# Altium PCB PCB_DevBoard_2024-04-22.pcbdoc
Units mm, origin at the board's own origin, x right, y up, seen from the top; angles counter-clockwise.
Board outline 130.65 x 125.25 mm, 2 copper layers (Top Layer, Bottom Layer); 54 components, 76 nets, 222 pads, 0 vias.
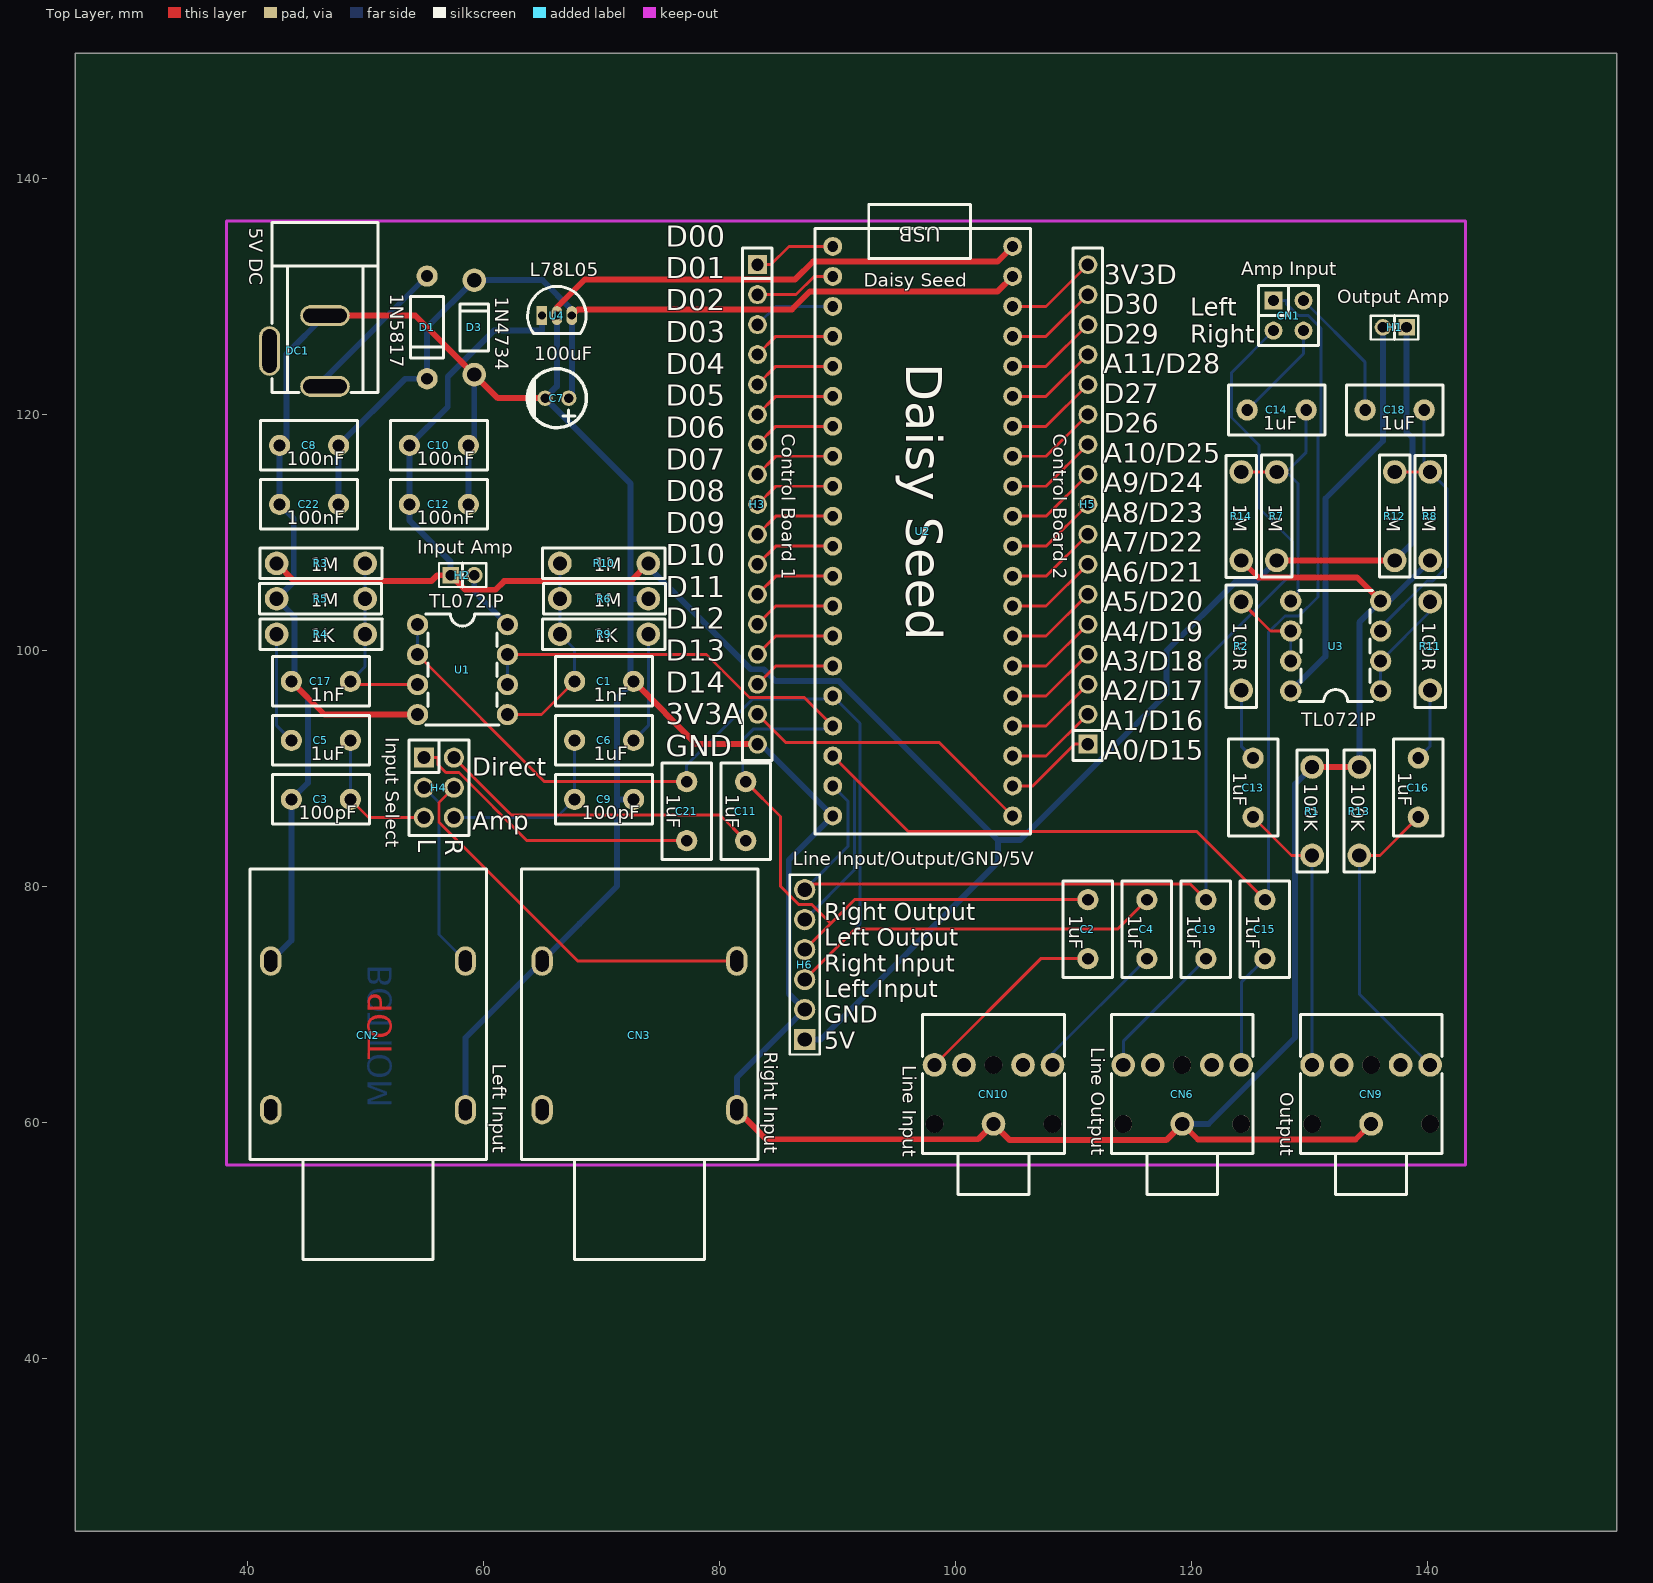
[diagram p0: Top Layer view]
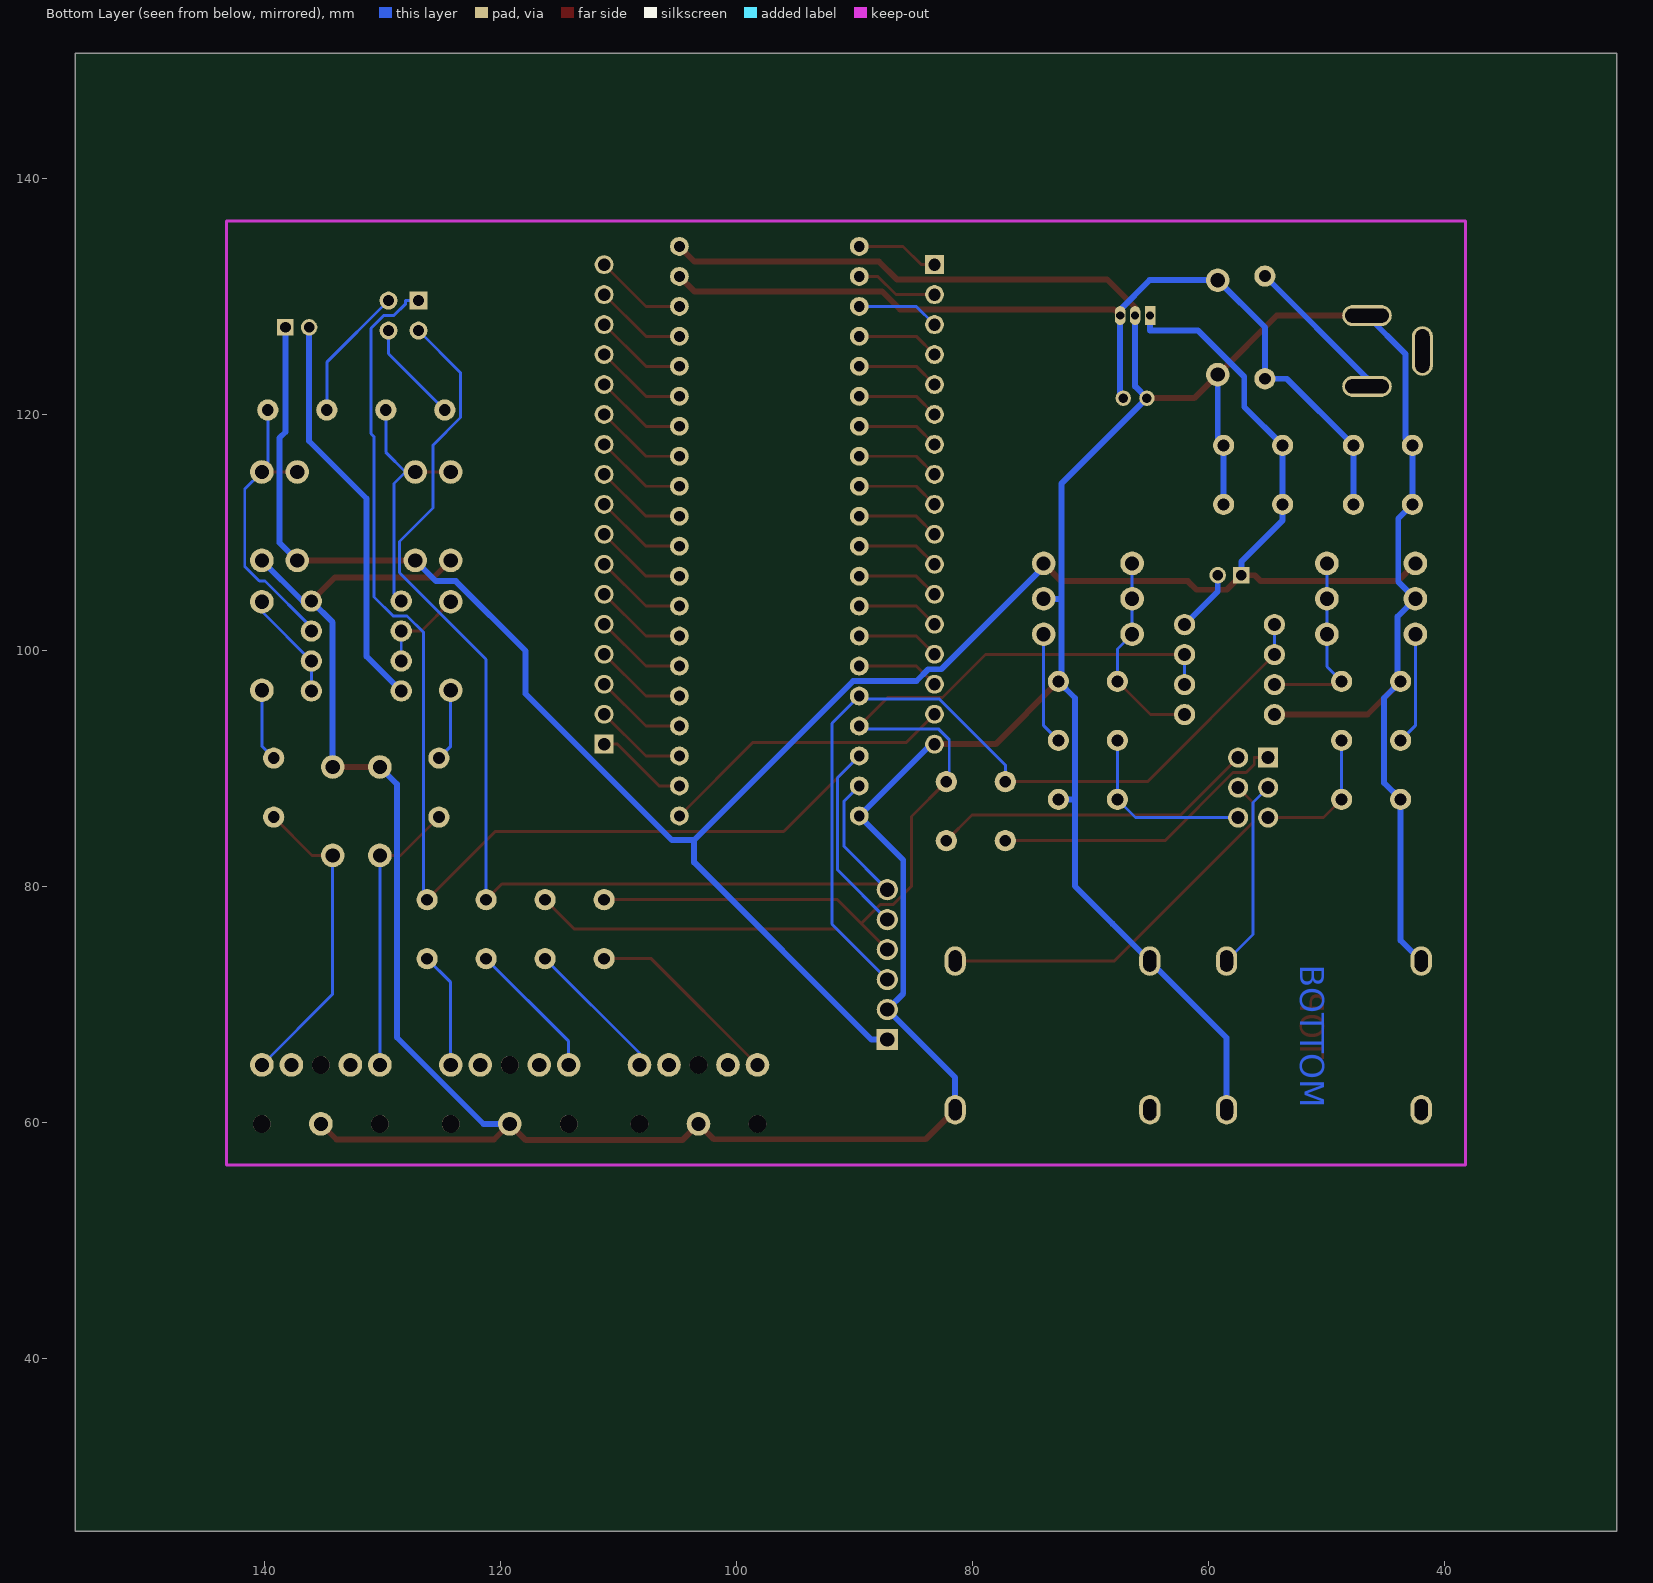
[diagram p1: Bottom Layer view, seen from below]

## Layer stack, top to bottom
Top Solder: solder mask 0.0102, Solder Resist, Dk 3.5
Top Layer: signal copper 0.0356
Dielectric1: dielectric 0.32, FR-4, Dk 4.8
Bottom Layer: signal copper 0.0356
Bottom Solder: solder mask 0.0102, Solder Resist, Dk 3.5

## Board outline
156.054,25.4 25.4,25.4 25.4,150.653 156.054,150.653

## Design rules (kind name [scope] priority, off if disabled: settings)
Clearance [All] p1: gap=0.254 ignorepadtopadclearanceinfootprint=FALSE except(0: Arc-Hole Track-Hole SMDPad-Hole THPad-Hole Via-Hole Fill-Hole Poly-Hole Region-Hole Text-Hole)
PolygonConnect [All] p1: connectstyle=Relief reliefconductorwidth=0.254 reliefentries=4 polygonreliefangle="90 Angle" airgapwidth=0.254
RoutingVias [All] p1: holewidth=0.711 width=1.27 viastyle="Through Hole" minholewidth=0.711 minwidth=1.27 maxholewidth=0.711 maxwidth=1.27
SolderMaskExpansion [All] p1: expansion=0.102 istentingtop=FALSE
Width [All] p1: maxlimit=0.254 minlimit=0.254 preferedwidth=0.254
30 further rules are at their usual default settings.

## Components (designator, comment, footprint, x,y, rotation, side; value= is the part's Value field where it differs from the comment)
C1 "1nF" CAP-TH_L8.0-W4.0-P5.00-D0.7 70.227,97.41 r0 top
C2 "1uF" CAP-TH_L8.0-W4.0-P5.00-D0.7 111.227,76.41 r90 top
C3 "100pF" CAP-TH_L8.0-W4.0-P5.00-D0.7 46.227,87.41 r180 top
C4 "1uF" CAP-TH_L8.0-W4.0-P5.00-D0.7 116.227,76.41 r90 top
C5 "1uF" CAP-TH_L8.0-W4.0-P5.00-D0.7 46.227,92.41 r180 top
C6 "1uF" CAP-TH_L8.0-W4.0-P5.00-D0.7 70.227,92.41 r0 top
C7 "100uF" CAP-TH_BD5.0-P2.00-D0.8-FD 66.227,121.41 r180 top
C8 "100nF" CAP-TH_L8.0-W4.0-P5.00-D0.7 45.227,117.41 r0 top
C9 "100pF" CAP-TH_L8.0-W4.0-P5.00-D0.7 70.227,87.41 r0 top
C10 "100nF" CAP-TH_L8.0-W4.0-P5.00-D0.7 56.227,117.41 r180 top
C11 "1uF" CAP-TH_L8.0-W4.0-P5.00-D0.7 82.227,86.41 r90 top
C12 "100nF" CAP-TH_L8.0-W4.0-P5.00-D0.7 56.227,112.41 r180 top
C13 "1uF" CAP-TH_L8.0-W4.0-P5.00-D0.7 125.227,88.41 r270 top
C14 "1uF" CAP-TH_L8.0-W4.0-P5.00-D0.7 127.227,120.41 r0 top
C15 "1uF" CAP-TH_L8.0-W4.0-P5.00-D0.7 126.227,76.41 r270 top
C16 "1uF" CAP-TH_L8.0-W4.0-P5.00-D0.7 139.227,88.41 r270 top
C17 "1nF" CAP-TH_L8.0-W4.0-P5.00-D0.7 46.227,97.41 r180 top
C18 "1uF" CAP-TH_L8.0-W4.0-P5.00-D0.7 137.227,120.41 r0 top
C19 "1uF" CAP-TH_L8.0-W4.0-P5.00-D0.7 121.226,76.41 r270 top
C21 "1uF" CAP-TH_L8.0-W4.0-P5.00-D0.7 77.227,86.41 r90 top
C22 "100nF" CAP-TH_L8.0-W4.0-P5.00-D0.7 45.227,112.41 r0 top
CN1 "Amp Input" HDR-TH_4P-P2.54-V-M-R2-C2-S2.54-1 128.227,128.41 r270 top
CN2 "Left Input" AUDIO-TH_CK6.35-3-15-6 50.227,67.411 r90 top
CN3 "Right Input" AUDIO-TH_CK6.35-3-15-6 73.226,67.411 r90 top
CN6 "Line Output" AUDIO-TH_XKB_PJ-3062-HD-R 119.226,62.41 r90 top
CN9 "Output" AUDIO-TH_XKB_PJ-3062-HD-R 135.227,62.41 r90 top
CN10 "Line Input" AUDIO-TH_XKB_PJ-3062-HD-R 103.228,62.409 r90 top
D1 "1N5817" DO-41_BD2.4-L4.7-P8.70-D0.9-RD 55.227,127.41 r90 top
D3 "1N4734" DO-41G_BD2.4-L4.0-P8.00-D0.7-RD 59.227,127.41 r270 top
DC1 "5V DC" CONN-TH_DC-005-2.5A-2.0 44.226,125.411 r270 top
H1 "Output Amp" HDR-TH_2P-P2.00-V-M 137.227,127.41 r180 top
H2 "Input Amp" HDR-TH_2P-P2.00-V-M 58.227,106.41 r0 top
H3 "Control Board 1" HDR-TH_17P-P2.54-V-M 83.227,112.41 r270 top
H4 "Input Select" HDR-TH_6P-P2.54-V-M-R2-C3-S2.54 56.227,88.41 r270 top
H5 "Control Board 2" HDR-TH_17P-P2.54-V-M 111.227,112.41 r90 top
H6 "Line Input/Output/GND/5V" HDR-TH_6P-P2.54-V-M-1 87.227,73.41 r90 top
R1 "100K" PS-RES-16.5*6.42 130.227,86.41 r270 top
R2 "100R" PS-RES-16.5*6.42 124.227,100.41 r90 top
R3 "1M" PS-RES-16.5*6.42 46.227,107.41 r180 top
R4 "1K" PS-RES-16.5*6.42 46.227,101.41 r180 top
R5 "1M" PS-RES-16.5*6.42 46.227,104.41 r0 top
R6 "1M" PS-RES-16.5*6.42 70.227,104.41 r180 top
R7 "1M" PS-RES-16.5*6.42 127.227,111.41 r270 top
R8 "1M" PS-RES-16.5*6.42 140.227,111.41 r90 top
R9 "1K" PS-RES-16.5*6.42 70.227,101.41 r0 top
R10 "1M" PS-RES-16.5*6.42 70.227,107.41 r0 top
R11 "100R" PS-RES-16.5*6.42 140.227,100.41 r90 top
R12 "1M" PS-RES-16.5*6.42 137.227,111.41 r270 top
R13 "100K" PS-RES-16.5*6.42 134.227,86.41 r270 top
R14 "1M" PS-RES-16.5*6.42 124.227,111.41 r90 top
U1 "TL072IP" PDIP-8_L10.2-W5.9-P2.54-LS7.6-BL 58.227,98.41 r270 top
U2 "Daisy Seed" DAISY_SEED 97.227,111.41 r180 top
U3 "TL072IP" PDIP-8_L10.2-W5.9-P2.54-LS7.6-BL 132.227,100.41 r90 top
U4 "L78L05" TO-92-3_L4.9-W3.7-P1.27-L 66.227,128.41 r0 top

## Footprints (in the part's own frame and the unit in brackets; to place one, negate y for a bottom-side part, rotate by r counter-clockwise, add the part's x,y. Pads: shape width x height; smd on the part's side, far side on the other; paste and mask are expansions set on the pad)
AUDIO-TH_CK6.35-3-15-6 [mm]
  oval 2.5x1.8 hole 1.1 slot 1.8 at 0 deg paste+0 mask+0.051: 1(-6.3,-8.25) 2(-6.3,8.25) 3(6.3,-8.25) 4(6.3,8.25)
  silkscreen extent -19,-10.03 14.1,10
AUDIO-TH_XKB_PJ-3062-HD-R [mm]
  round 2 hole 1.2 paste+0 mask+0.051: 1(-2.5,0) 2(2.5,5) 3(2.5,2.5) 4(2.5,-2.5) 5(2.5,-5)
  round 1.5 hole 1.5 unplated paste+0: ""(-2.5,5) ""(-2.5,-5) ""(2.5,0)
  silkscreen extent -8.5,-6 6.77,6
CAP-TH_BD5.0-P2.00-D0.8-FD [mm]
  round 1.3 hole 0.8 paste+0 mask+0.051: 1(-1,0) 2(1,0)
  silkscreen extent -2.5,-2.5 2.5,2.5
CAP-TH_L8.0-W4.0-P5.00-D0.7 [mm]
  round 1.8 hole 1 paste+0 mask+0.051: 1(-2.5,0) 2(2.5,0)
  silkscreen extent -4.1,-2.1 4.1,2.1
CONN-TH_DC-005-2.5A-2.0 [mm]
  oval 1.8x4.2 hole 1.2 slot 3.7 at 90 deg paste+0 mask+0.051: 1(3,2.35) 2(-3,2.35)
  oval 4.2x1.8 hole 1.2 slot 3.7 at 0 deg paste+0 mask+0.051: 3(0,-2.35)
  silkscreen extent -10.9,-2.15 3.5,6.85
DAISY_SEED [mm]
  round 1.6 hole 0.914 paste+0 mask+0.102: 1(7.62,-22.86) 2(7.62,-20.32) 3(7.62,-17.78) 4(7.62,-15.24) 5(7.62,-12.7) 6(7.62,-10.16) 7(7.62,-7.62) 8(7.62,-5.08) 9(7.62,-2.54) 10(7.62,0) 11(7.62,2.54) 12(7.62,5.08) 13(7.62,7.62) 14(7.62,10.16) 15(7.62,12.7) 16(7.62,15.24) 17(7.62,17.78) 18(7.62,20.32) 19(7.62,22.86) 20(7.62,25.4) 21(-7.62,25.4) 22(-7.62,22.86) 23(-7.62,20.32) 24(-7.62,17.78) 25(-7.62,15.24) 26(-7.62,12.7) 27(-7.62,10.16) 28(-7.62,7.62) 29(-7.62,5.08) 30(-7.62,2.54) 31(-7.62,0) 32(-7.62,-2.54) 33(-7.62,-5.08) 34(-7.62,-7.62) 35(-7.62,-10.16) 36(-7.62,-12.7) 37(-7.62,-15.24) 38(-7.62,-17.78) 39(-7.62,-20.32) 40(-7.62,-22.86)
  silkscreen extent -9.14,-26.42 9.14,26.92
DO-41_BD2.4-L4.7-P8.70-D0.9-RD [mm]
  round 1.8 hole 1 paste+0 mask+0.051: 1(-4.35,0) 2(4.35,0)
  silkscreen extent -2.6,-1.4 2.6,1.4
DO-41G_BD2.4-L4.0-P8.00-D0.7-RD [mm]
  round 2 hole 1.2 paste+0 mask+0.051: 1(-4,0) 2(4,0)
  silkscreen extent -2,-1.2 2,1.2
HDR-TH_2P-P2.00-V-M [mm]
  rect 1.4x1.4 hole 0.9 paste+0 mask+0.051: 1(-1,0)
  round 1.4 hole 0.9 paste+0 mask+0.051: 2(1,0)
  silkscreen extent -1.99,-1 2.02,1.03
HDR-TH_4P-P2.54-V-M-R2-C2-S2.54-1 [mil]
  rect 60x60 hole 36 paste+0 mask+2: 1(-50,-50)
  round 60 hole 36 paste+0 mask+2: 2(-50,50) 3(50,-50) 4(50,50)
  silkscreen extent -100,-100 100,100
HDR-TH_6P-P2.54-V-M-1 [mm]
  rect 1.8x1.8 hole 1.2 paste+0 mask+0.051: 1(-6.35,0)
  round 1.8 hole 1.2 paste+0 mask+0.051: 2(-3.81,0) 3(-1.27,0) 4(1.27,0) 5(3.81,0) 6(6.35,0)
  silkscreen extent -7.62,-1.27 7.62,1.27
HDR-TH_6P-P2.54-V-M-R2-C3-S2.54 [mm]
  rect 1.7x1.7 hole 1.1 paste+0 mask+0.051: 1(-2.54,-1.27)
  round 1.7 hole 1.1 paste+0 mask+0.051: 2(-2.54,1.27) 3(0,-1.27) 4(0,1.27) 5(2.54,-1.27) 6(2.54,1.27)
  silkscreen extent -4.04,-2.54 4.04,2.54
HDR-TH_17P-P2.54-V-M [mm]
  rect 1.6x1.6 hole 1.05 paste+0 mask+0.051: 1(-20.32,0)
  round 1.6 hole 1.05 paste+0 mask+0.051: 2(-17.78,0) 3(-15.24,0) 4(-12.7,0) 5(-10.16,0) 6(-7.62,0) 7(-5.08,0) 8(-2.54,0) 9(0,0) 10(2.54,0) 11(5.08,0) 12(7.62,0) 13(10.16,0) 14(12.7,0) 15(15.24,0) 16(17.78,0) 17(20.32,0)
  silkscreen extent -21.71,-1.25 21.71,1.25
PDIP-8_L10.2-W5.9-P2.54-LS7.6-BL [mm]
  round 1.8 hole 1.1 paste+0 mask+0.051: 1(-3.81,-3.81) 2(-1.27,-3.81) 3(1.27,-3.81) 4(3.81,-3.81) 5(3.81,3.81) 6(1.27,3.81) 7(-1.27,3.81) 8(-3.81,3.81)
  silkscreen extent -4.7,-3.11 4.7,3.11
PS-RES-16.5*6.42 [mm]
  round 2 hole 1.2 paste+0 mask+0.051: 1(-3.749,0) 2(3.749,0)
  silkscreen extent -5.2,-1.3 5.15,1.3
TO-92-3_L4.9-W3.7-P1.27-L [mm]
  rect 0.9x1.6 hole 0.7 paste+0 mask+0.051: 1(-1.27,0)
  oval 0.9x1.6 hole 0.7 paste+0 mask+0.051: 2(0,0) 3(1.27,0)
  silkscreen extent -2.48,-1.5 2.48,2.48

## Nets (pads, with @x,y where several pads share a name; then routed paths per layer and width w, separated by ;. In a path a pad name is that pad's centre, name@x,y a point inside that pad or via, vN(x,y) a via of type N, cw(c..) or ccw(c..) an arc to the next point about the centre after c; other vN are vias at no path point)
3V3A: H3.16 U2.21 | length 25.2
  Top Layer w0.25: H3.16 85.64,92.217 98.64,92.217 U2.21
3V3D: H5.17 U2.38 | length 7.8
  Top Layer w0.25: U2.38 107.687,129.19 H5.17
5V: C10.2 C12.2 H1.1 H2.1 H6.1 R3.2 R7.2 R10.2 R12.2 U4.1 | length 194.4
  Top Layer w0.5: R3.2 43.978,105.91 55.577,105.91 56.077,106.41 H2.1 58.461,105.175 61.019,105.175 61.754,105.91 72.476,105.91 R10.2 ; R7.2 R12.2
  Bottom Layer w0.5: H2.1 57.227,107.56 53.727,111.06 C12.2 C10.2 56.981,120.664 56.981,123.232 60.909,127.159 64.957,127.159 U4.1 ; R10.2 73.976,107.123 82.659,98.44 83.759,98.44 84.759,97.44 90.12,97.44 103.595,83.965 ; H6.1 88.577,67.06 103.595,82.078 103.595,83.965 ; R7.2 125.476,105.91 123.788,105.91 117.88,100.002 117.88,96.363 105.482,83.965 103.595,83.965 ; R12.2 138.727,109.161 138.727,118.048 138.227,118.548 H1.1
5VDCIN: D1.2 DC1.1 | length 12.9
  Bottom Layer w0.5: DC1.1 46.577,123.11 D1.2
A00/D15: H5.1 U2.22 | length 7.8
  Top Layer w0.25: U2.22 106.561,88.55 110.101,92.09 H5.1
A01/D16: H5.2 U2.23 | length 7.8
  Top Layer w0.25: U2.23 107.687,91.09 H5.2
A02/D17: H5.3 U2.24 | length 7.8
  Top Layer w0.25: U2.24 107.687,93.63 H5.3
A03/D18: H5.4 U2.25 | length 7.8
  Top Layer w0.25: U2.25 107.687,96.17 H5.4
A04/D19: H5.5 U2.26 | length 7.8
  Top Layer w0.25: U2.26 107.687,98.71 H5.5
A05/D20: H5.6 U2.27 | length 7.8
  Top Layer w0.25: U2.27 107.687,101.25 H5.6
A06/D21: H5.7 U2.28 | length 7.8
  Top Layer w0.25: U2.28 107.687,103.79 H5.7
A07/D22: H5.8 U2.29 | length 7.8
  Top Layer w0.25: U2.29 107.687,106.33 H5.8
A08/D23: H5.9 U2.30 | length 7.8
  Top Layer w0.25: U2.30 107.687,108.87 H5.9
A09/D24: H5.10 U2.31 | length 7.8
  Top Layer w0.25: U2.31 107.687,111.41 H5.10
A10/D25: H5.11 U2.32 | length 7.8
  Top Layer w0.25: U2.32 107.687,113.95 H5.11
A11/D28: H5.14 U2.35 | length 7.8
  Top Layer w0.25: U2.35 107.687,121.57 H5.14
C5_2: C5.2 R4.2 | length 9.5
  Bottom Layer w0.25: R4.2 42.478,93.659 C5.2
C13_1: C13.1 R2.1 | length 6.2
  Bottom Layer w0.25: R2.1 124.227,91.91 C13.1
CN2_2: CN2.2
CN3_2: CN3.2
CN6_2: C19.2 CN6.2 | length 11.9
  Bottom Layer w0.25: CN6.2 114.226,66.91 C19.2
CN6_3: CN6.3
CN6_4: CN6.4
CN6_5: C15.2 CN6.5 | length 9.8
  Bottom Layer w0.25: CN6.5 124.227,71.91 C15.2
CN9_3: CN9.3
CN9_4: CN9.4
CN10_2: C2.1 CN10.2 | length 16.7
  Top Layer w0.25: CN10.2 107.228,73.91 C2.1
CN10_3: CN10.3
CN10_4: CN10.4
CN10_5: C4.1 CN10.5 | length 12.3
  Bottom Layer w0.25: CN10.5 108.228,65.911 C4.1
D00: H3.1 U2.1 | length 7
  Top Layer w0.25: H3.1 84.352,132.73 85.892,134.27 U2.1
D01: H3.2 U2.2 | length 7
  Top Layer w0.25: H3.2 86.492,130.19 88.032,131.73 U2.2
D02: H3.3 U2.3 | length 7
  Bottom Layer w0.25: H3.3 84.767,129.19 U2.3
D03: H3.4 U2.4 | length 7
  Top Layer w0.25: H3.4 84.767,126.65 U2.4
D04: H3.5 U2.5 | length 7
  Top Layer w0.25: H3.5 84.767,124.11 U2.5
D05: H3.6 U2.6 | length 7
  Top Layer w0.25: H3.6 84.767,121.57 U2.6
D06: H3.7 U2.7 | length 7
  Top Layer w0.25: H3.7 84.767,119.03 U2.7
D07: H3.8 U2.8 | length 7
  Top Layer w0.25: H3.8 84.767,116.49 U2.8
D08: H3.9 U2.9 | length 7
  Top Layer w0.25: H3.9 84.767,113.95 U2.9
D09: H3.10 U2.10 | length 7
  Top Layer w0.25: H3.10 84.767,111.41 U2.10
D10: H3.11 U2.11 | length 7
  Top Layer w0.25: H3.11 84.767,108.87 U2.11
D11: H3.12 U2.12 | length 7
  Top Layer w0.25: H3.12 84.767,106.33 U2.12
D12: H3.13 U2.13 | length 7
  Top Layer w0.25: H3.13 84.767,103.79 U2.13
D13: H3.14 U2.14 | length 7
  Top Layer w0.25: H3.14 84.767,101.25 U2.14
D14: H3.15 U2.15 | length 7
  Top Layer w0.25: H3.15 84.767,98.71 U2.15
D26: H5.12 U2.33 | length 7.8
  Top Layer w0.25: U2.33 107.687,116.49 H5.12
D27: H5.13 U2.34 | length 7.8
  Top Layer w0.25: U2.34 107.687,119.03 H5.13
D29: H5.15 U2.36 | length 7.8
  Top Layer w0.25: U2.36 107.687,124.11 H5.15
D30: H5.16 U2.37 | length 7.8
  Top Layer w0.25: U2.37 107.687,126.65 H5.16
DC1_3: DC1.3
GND: C1.2 C3.2 C7.2 C8.1 C9.2 C10.1 C12.1 C17.2 C22.1 CN2.1 CN2.4 CN3.1 CN3.4 CN6.1 CN9.1 CN10.1 D3.2 DC1.2 H3.17 H6.2 R1.1 R5.1 R6.1 R8.1 R13.1 R14.1 U1.4 U2.20 U2.40 U3.4 U4.2 | length 412.5
  Top Layer w0.5: C17.2 46.537,94.6 U1.4 ; DC1.2 54.226,128.411 D3.2 61.227,121.41 C7.2 ; U4.2 66.227,129.099 68.606,131.478 86.417,131.478 87.939,133 103.577,133 U2.40 ; C1.2 78.047,92.09 H3.17 ; CN3.1 83.979,58.608 101.927,58.608 CN10.1 104.597,58.539 117.855,58.539 119.226,59.91 120.554,58.582 133.899,58.582 CN9.1 ; R14.1 125.678,106.209 134.047,106.209 U3.4 ; R1.1 R13.1
  Bottom Layer w0.5: CN2.4 43.727,75.461 C3.2 45.133,88.816 45.133,96.003 C17.2 43.977,97.66 43.977,102.911 R5.1 43.93,105.861 43.93,111.207 C22.1 C8.1 43.303,117.986 43.303,125.137 DC1.2 ; CN2.1 58.477,67.212 68.124,76.858 CN3.4 ; C12.1 C10.1 59.227,117.91 D3.2 ; U4.2 66.227,122.41 C7.2 72.477,114.16 72.477,104.41 ; 68.149,76.883 71.321,80.055 71.321,87.41 ; C9.2 71.321,87.41 ; R6.1 72.477,104.41 ; CN3.1 81.477,63.85 H6.2 85.875,70.951 85.875,82.278 U2.20 83.527,92.09 H3.17 ; CN6.1@119.226,59.91 121.447,59.91 128.775,67.237 128.775,88.707 R1.1 ; R13.1 134.227,102.41 U3.4 136.786,104.22 R8.1 ; 71.321,87.41 71.321,96.004 C1.2 72.477,97.66 72.477,104.41
H1_2: H1.2 U3.8 | length 34
  Bottom Layer w0.5: U3.8 131.354,99.537 131.354,112.912 136.227,117.785 H1.2
H4_1: C21.1 H4.1 | length 25.5
  Top Layer w0.25: H4.1 56.132,90.95 56.132,90.362 56.814,89.68 57.93,89.68 63.7,83.91 C21.1
H4_2: C11.1 H4.2 | length 27.6
  Top Layer w0.25: H4.2 62.355,86.092 80.045,86.092 C11.1
LEFTIN: CN2.3 H4.3 | length 16.2
  Bottom Layer w0.25: H4.3 56.227,87.14 56.227,75.961 CN2.3
LINEINAMPL: C3.1 C5.1 H4.5 | length 11.9
  Top Layer w0.25: C3.1 50.267,85.87 H4.5
  Bottom Layer w0.25: C3.1 C5.1
LINEINAMPR: C6.1 C9.1 H4.6 | length 15.9
  Bottom Layer w0.25: H4.6 66.187,85.87 C9.1 C6.1
LINEINL: C4.2 C21.2 H6.3 U1.1 U1.2 U2.16 | length 104.8
  Top Layer w0.25: U1.2 65.187,88.91 C21.2 ; H6.3 91.497,76.41 113.727,76.41 C4.2
  Bottom Layer w0.25: U1.2 U1.1 ; C21.2 77.227,90.317 82.81,95.9 89.337,95.9 U2.16 91.921,93.856 91.921,76.834 H6.3
LINEINR: C2.2 C11.2 H6.4 U1.6 U1.7 U2.17 | length 85.8
  Top Layer w0.25: U1.7 78.914,99.68 82.551,96.043 87.194,96.043 U2.17 ; C11.2 85.175,85.962 85.175,80.049 86.734,78.49 87.835,78.49 89.436,76.889 ; H6.4 89.436,76.889 ; C2.2 91.457,78.91 89.436,76.889
  Bottom Layer w0.25: U1.6 U1.7 ; C11.2 81.978,89.158 81.978,92.474 82.864,93.36 89.337,93.36 U2.17
LINEOUTAMPL: C18.1 CN1.2 | length 11.4
  Bottom Layer w0.25: CN1.2 134.727,124.45 C18.1
LINEOUTAMPR: C14.1 CN1.4 | length 8.7
  Bottom Layer w0.25: C14.1 129.497,125.18 CN1.4
LINEOUTL: C15.1 CN1.1 H6.5 U2.18 | length 114.3
  Top Layer w0.25: U2.18 96.009,84.688 120.449,84.688 C15.1
  Bottom Layer w0.25: H6.5 91.457,81.45 91.457,89.24 U2.18 ; C15.1 126.517,79.2 126.517,101.546 127.921,102.95 129.104,102.95 130.728,104.574 130.728,118.145 130.988,118.405 130.988,127.329 129.906,128.41 129.042,128.41 128.044,129.408 128.044,129.68 CN1.1
LINEOUTR: C19.1 CN1.3 H6.6 U2.19 | length 100.5
  Top Layer w0.25: H6.6 87.707,80.24 119.895,80.24 C19.1
  Bottom Layer w0.25: H6.6 90.88,83.413 90.88,87.276 U2.19 ; C19.1 121.226,99.282 128.567,106.623 128.567,109.262 125.727,112.103 125.727,117.432 123.385,119.774 123.385,123.568 CN1.3
OUTL: C16.2 CN9.5 R13.2 | length 26.6
  Top Layer w0.25: R13.2 135.978,82.661 C16.2
  Bottom Layer w0.25: R13.2 134.227,70.91 CN9.5
OUTR: C13.2 CN9.2 R1.2 | length 24.1
  Top Layer w0.25: C13.2 128.476,82.661 R1.2
  Bottom Layer w0.25: CN9.2 R1.2
R2_2: R2.2 U3.6 U3.7 | length 7.8
  Top Layer w0.25: R2.2 126.706,101.68 U3.6
  Bottom Layer w0.25: U3.7 U3.6
R7_1: C14.2 R7.1 R14.2 U3.5 | length 21.4
  Top Layer w0.25: R14.2 R7.1
  Bottom Layer w0.25: R7.1 R7.1@128.047,115.159 ; U3.5 129.032,104.835 129.032,114.174 R7.1@128.047,115.159 ; C14.2 129.727,116.839 R7.1@128.047,115.159
R8_2: C18.2 R8.2 R12.1 U3.3 | length 25.2
  Top Layer w0.25: R12.1 R8.2
  Bottom Layer w0.25: U3.3 136.037,101.99 139.957,105.91 140.443,105.91 141.68,107.146 141.68,113.706 R8.2 139.727,115.659 C18.2
R9_2: C6.2 R9.2 | length 9.5
  Bottom Layer w0.25: C6.2 73.976,93.659 R9.2
R11_1: C16.1 R11.1 | length 6.2
  Bottom Layer w0.25: C16.1 140.227,91.91 R11.1
R11_2: R11.2 U3.1 U3.2 | length 9.3
  Bottom Layer w0.25: U3.1 U3.2 140.227,103.33 R11.2
RIGHTIN: CN3.3 H4.4 | length 33.6
  Top Layer w0.25: H4.4 56.227,87.14 56.227,85.469 67.985,73.711 CN3.3
U1_3: C17.1 R3.1 R4.1 R5.2 U1.3 | length 16.3
  Top Layer w0.25: C17.1 48.997,97.14 U1.3
  Bottom Layer w0.25: C17.1 49.976,98.659 R4.1 R5.2 R3.1
U1_5: C1.1 R6.2 R9.1 R10.1 U1.5 | length 17.4
  Top Layer w0.25: U1.5 64.917,94.6 C1.1
  Bottom Layer w0.25: R10.1 R6.2 R9.1 67.727,100.161 C1.1
U1_8: H2.2 U1.8 | length 5.4
  Bottom Layer w0.5: H2.2 59.227,105.03 U1.8
VCC: C7.1 C8.2 C22.2 D1.1 D3.1 U2.39 U4.3 | length 80.5
  Top Layer w0.5: U4.3 68.007,128.92 86.135,128.92 87.675,130.46 103.577,130.46 U2.39
  Bottom Layer w0.5: C22.2 C8.2 53.377,123.06 D1.1 55.227,127.41 D3.1 65.004,131.41 67.497,128.917 U4.3 67.497,121.68 C7.1
pads on no net: CN6. CN9. CN10.

## Other copper
Top Layer:
  text "TOP" at 52.243,65.41 h2.03 r90
Bottom Layer:
  text "BOTTOM" at 52.243,73.41 h2.03 r90

## Silkscreen, mask and mechanical layers (free items; w line width, h text height)
Top Overlay:
  text "Left / Right" at 119.888,126.111 h1.53
  text "D00 / D01 / D02 / D03 / D04 / D05 / D06 / D07 / D08 / D09 / D10 / D11 / D12 / D13 / D14 / 3V3A / GND" at 75.438,91.059 h1.8
  text "3V3D / D30 / D29 / A11/D28 / D27 / D26 / A10/D25 / A9/D24 / A8/D23 / A7/D22 / A6/D21 / A5/D20 / A4/D19 / A3/D18 / A2/D17 / A1/D16 / A0/D15" at 112.589,90.754 h1.68
  text "Direct /  / Amp" at 59.055,84.836 h1.53
  text "R / L" at 54.483,84.074 h1.53 r270
  text "Right Output / Left Output / Right Input / Left Input / GND / 5V" at 88.9,66.294 h1.45

## Text inside footprints (layer, text, board x,y; h text height)
U2: Top Overlay "USB" at 98.751,135.921 h1.27 r180